# Altium PCB Bollbot_V100.PcbDoc
Units mil, origin at the board's own origin, x right, y up, seen from the top; angles counter-clockwise.
Board outline 4173.23 x 2952.76 mil, 4 copper layers (Top Layer, VCC, GND, Bottom Layer), stack 30.634 mil thick; 143 components, 132 nets, 550 pads, 270 vias.
Unrouted connection lines stored in the file: 312.
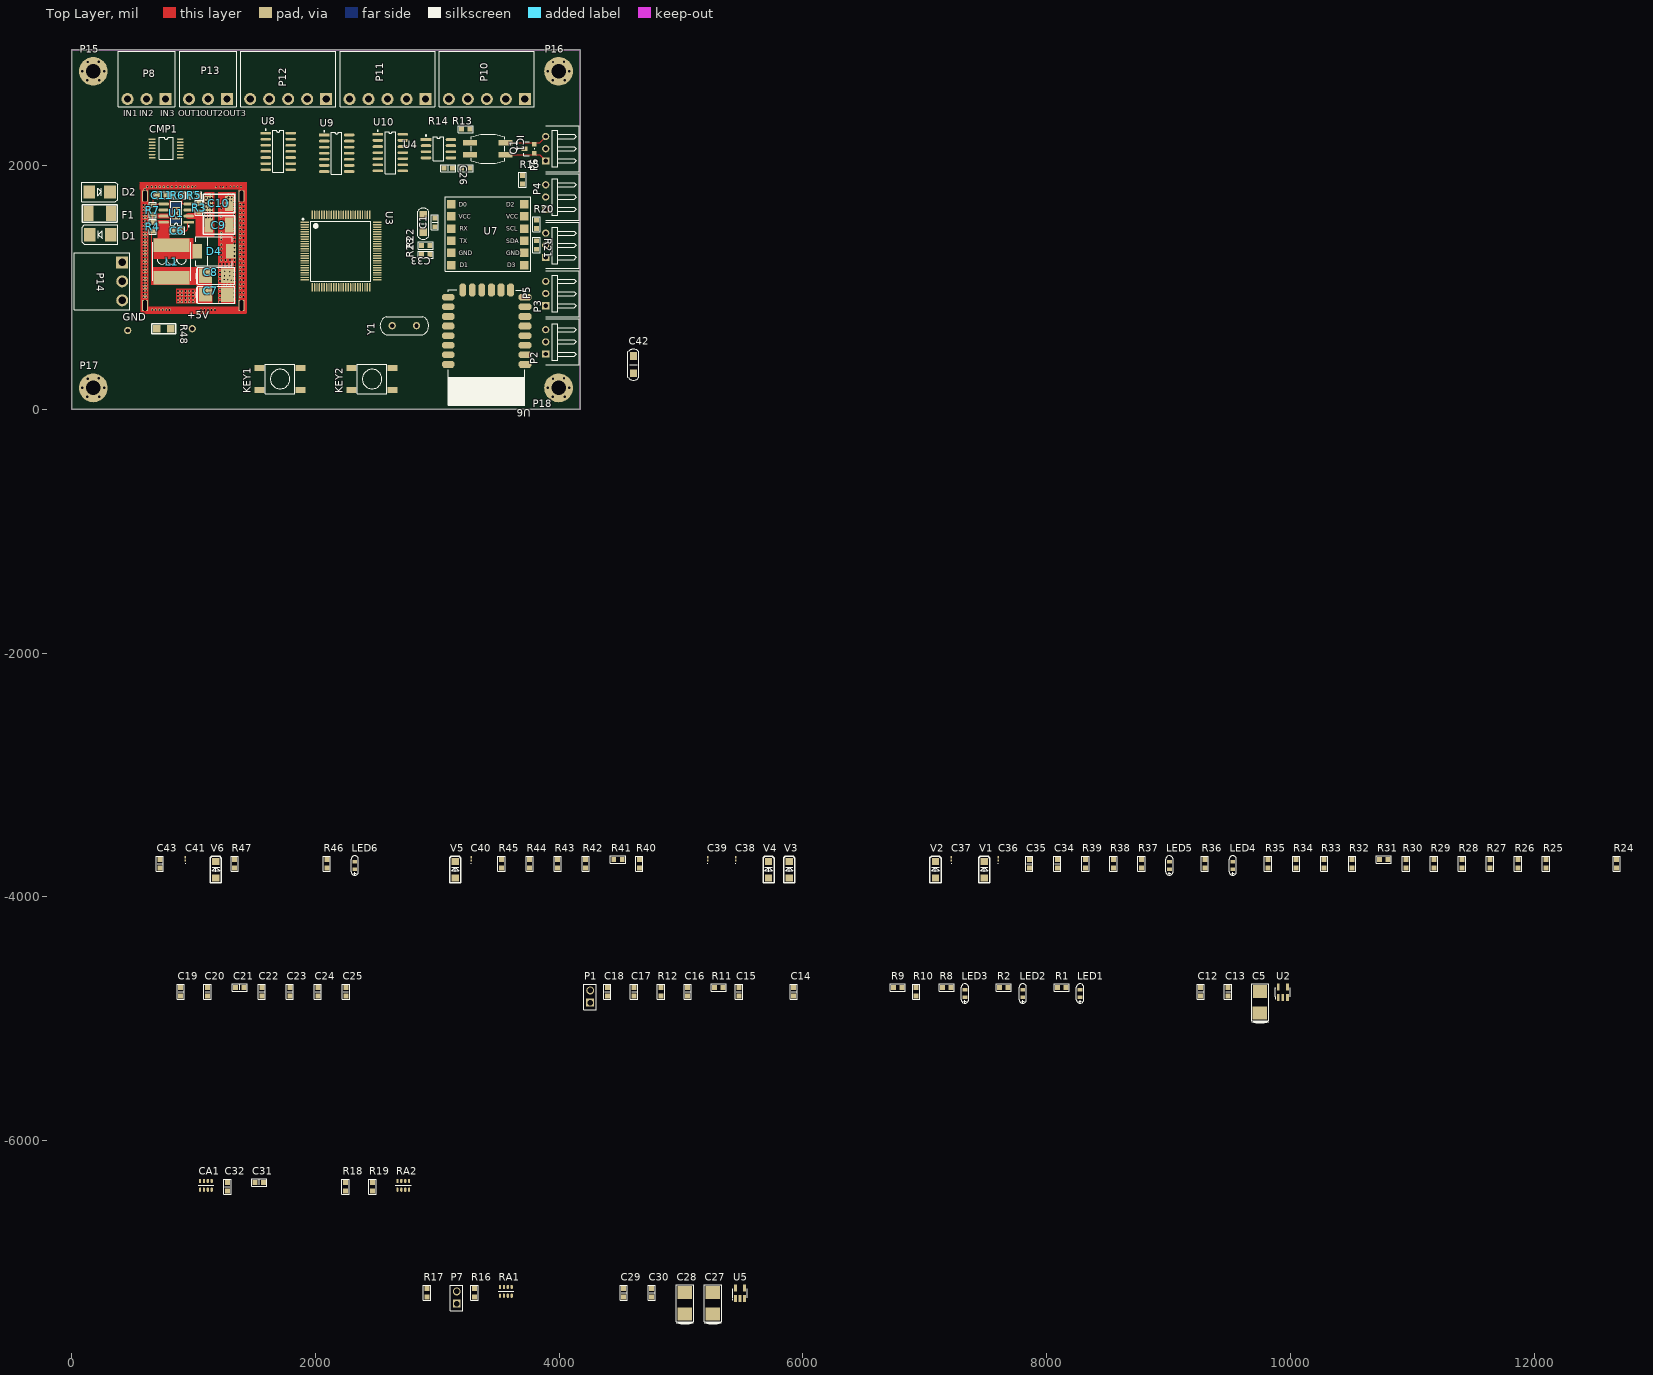
[diagram p0: Top Layer view]
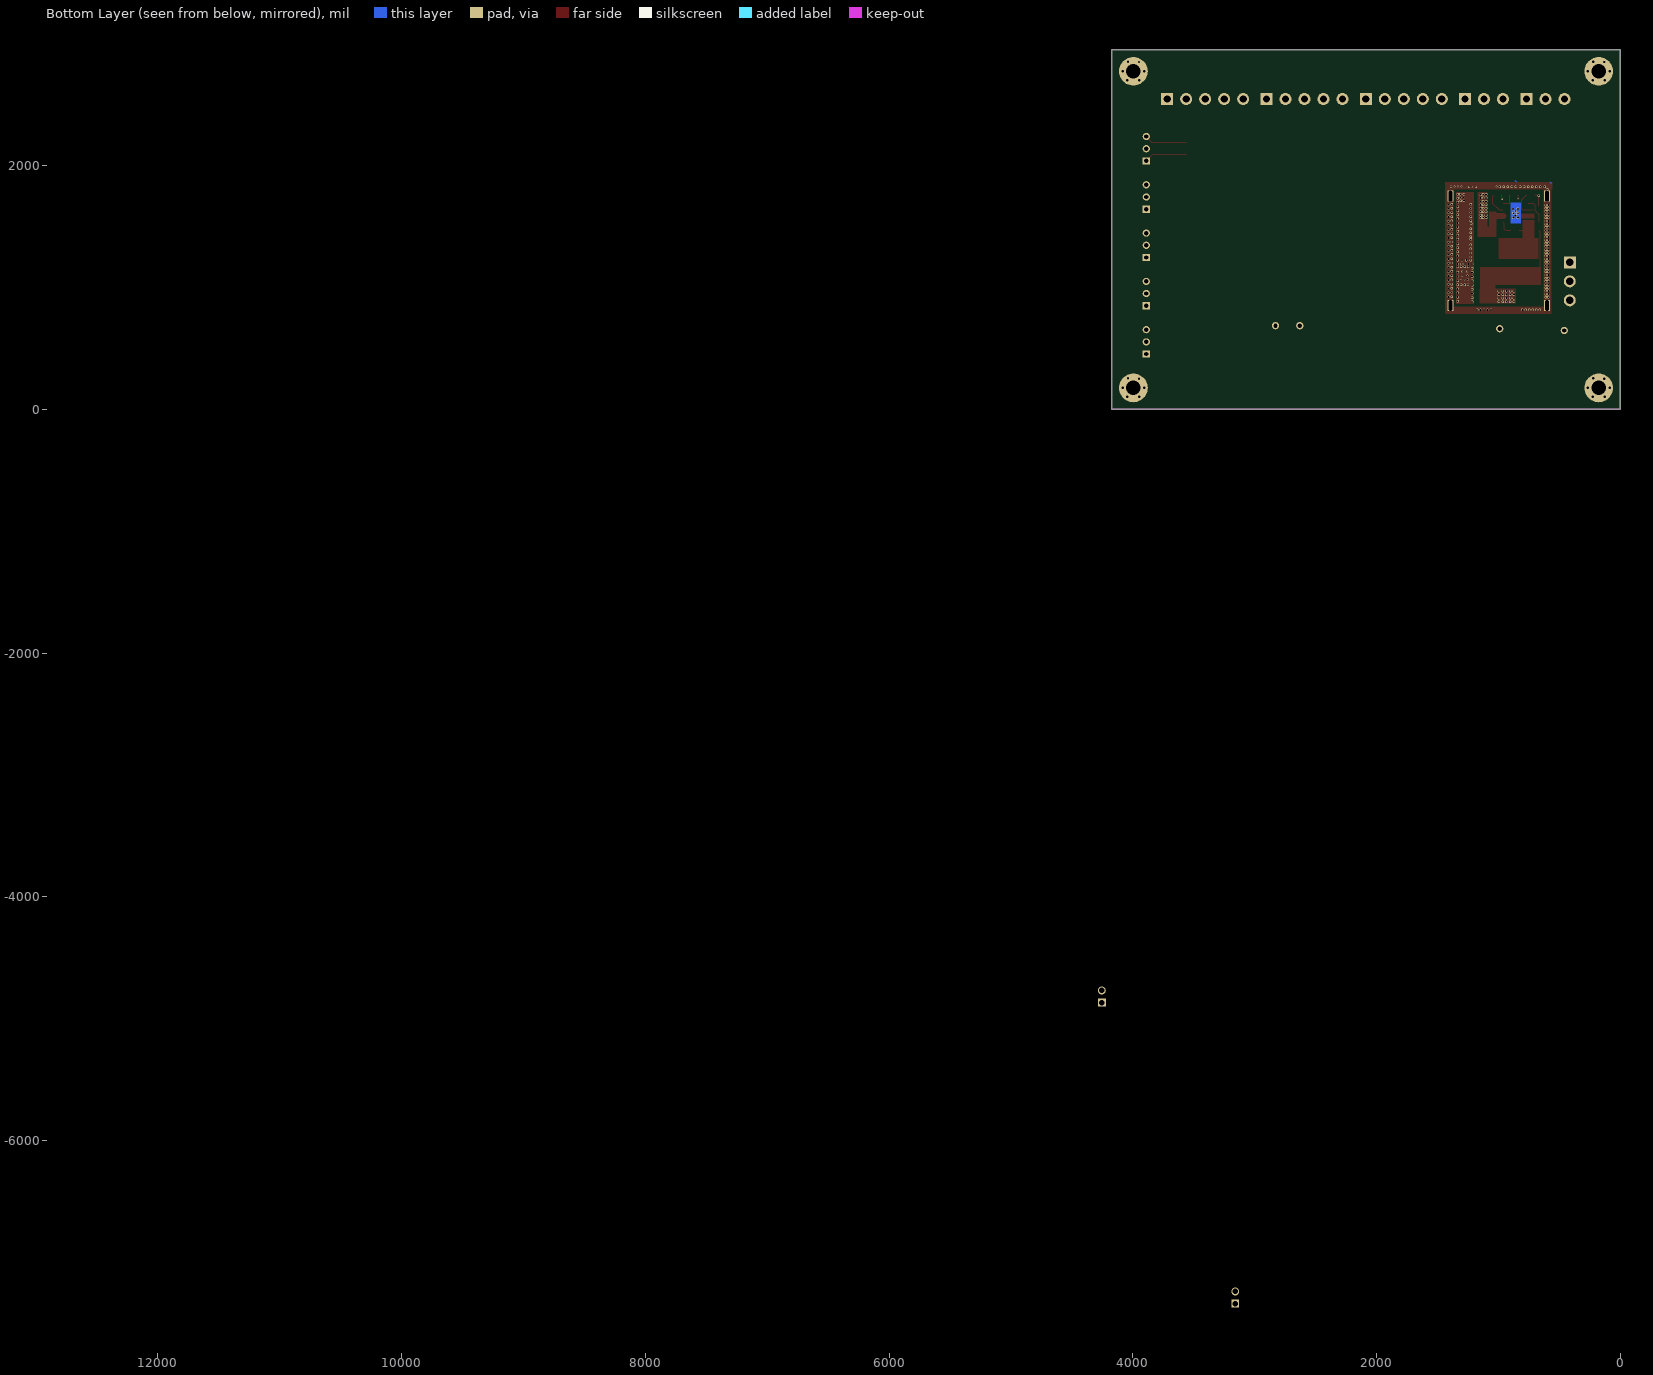
[diagram p1: Bottom Layer view, seen from below]

## Layer stack, top to bottom
Top Solder: solder mask 0.4, Solder Resist, Dk 3.5
Top Layer: signal copper 1.4
Dielectric 1: core 10, FR-4, Dk 4.2
VCC: signal copper 1.417
Dielectric 3: prepreg 5, Dk 4.2
GND: signal copper 1.417
Dielectric 2: core 10, Dk 4.2
Bottom Layer: signal copper 1.4
Bottom Solder: solder mask 0.4, Solder Resist, Dk 3.5

## Board outline
0,0 4173.23,0 4173.23,2952.76 0,2952.76

## Design rules (kind name [scope] priority, off if disabled: settings)
Clearance Clearance_1 [All] p1 off: gap=15
Clearance [All] p2: gap=8
ComponentClearance [All] p1: gap=0 collisioncheckmode=3 verticalgap=0 showdistances=FALSE
HoleSize [All] p1: absolutevalues=TRUE maxlimit=500 minlimit=1 maxpercent=80.000 minpercent=20.000
HoleToHoleClearance [All] p1: gap=0 allowstackedmicrovias=TRUE
MinimumSolderMaskSliver [All] p1: minsoldermaskwidth=0
PlaneClearance [InNet('GND')] p1 off: clearance=0
PlaneClearance PlaneClearance_1 [All] p2: clearance=20
PolygonConnect [IsVia vs InNet('VCC_+3.0V')] p1: connectstyle=Direct reliefconductorwidth=10 reliefentries=4 polygonreliefangle="90 Angle" airgapwidth=10
PolygonConnect PolygonConnect_1 [IsVia vs InNet('GND')] p2: connectstyle=Direct reliefconductorwidth=10 reliefentries=4 polygonreliefangle="90 Angle" airgapwidth=10
PolygonConnect PolygonConnect_2 [All] p3: connectstyle=Relief reliefconductorwidth=10 reliefentries=4 polygonreliefangle="90 Angle" airgapwidth=10
RoutingVias [All] p1: holewidth=12 width=20 viastyle="Through Hole" minholewidth=12 minwidth=20 maxholewidth=100 maxwidth=120
SilkToSilkClearance [All] p1: silktosilkclearance=0
SilkToSolderMaskClearance SilkscreenOverComponentPads [IsPad] p1: minsilkscreentomaskgap=0 clearancetoexposedcopper=TRUE
SolderMaskExpansion [All] p1: expansion=4
Width [All] p1: maxlimit=60 minlimit=8 preferedwidth=8
23 further rules are at their usual default settings.

## Classes and differential pairs
component class CAN: C26 IC1 P6 Q1 R13 R14 R15 U4
component class ESP8266: C27 C28 C29 C30 P7 R16 R17 RA1 U5 U6
component class IO: C31 C32 CA1 CMP1 P8 R18 R19 RA2
component class JY901: C1 C33 P5 R20 R21 R22 R23 U7
component class MCU: C5 C12 C13 C14 C15 C16 C17 C18 C19 C20 C21 C22 C23 C24 C25 KEY1 KEY2 LED1 LED2 LED3 P1 P2 P3 P4 P15 P16 P17 P18 R1 R2 R8 R9 R10 R11 R12 U2 U3 Y1
component class Power: +5V C6 C7 C8 C9 C10 C11 C42 D1 D2 D4 F1 GND L1 P14 R3 R4 R5 R6 R7 R48 U1
component class PWM: C34 C35 C36 C37 C38 C39 C40 C41 C43 LED4 LED5 LED6 P10 P11 P12 P13 R24 R25 R26 R27 R28 R29 R30 R31 R32 R33 R34 R35 R36 R37 R38 R39 R40 R41 R42 R43 R44 R45 R46 R47 U8 U9 U10 V1 V2 V3 V4 V5 V6

## Components (designator, comment, footprint, x,y, rotation, side; value= is the part's Value field where it differs from the comment)
+5V "Test Point" TestPoint-2 990,662.76 r0 top
C1 "0.1uF" 0603C 2980,1535 r90 top
C5 "10uF" CAPTANC 9750,-4952.24 r90 top
C6 "0.1uF/50V" 0603C 865,1467.76 r0 top
C7 "100uF/16V" CAPTANC 1100,943.76 r0 top locked
C8 "100uF/16V" CAPTANC 1100,1098.76 r0 top locked
C9 "47uF/50V" 1812C 1209,1513.76 r0 top
C10 "47uF/50V" 1812C 1209,1690.76 r0 top
C11 "22nF/50V" 0603C 738,1757.76 r0 top
C12 "0.1uF" 0603C 9265,-4777.24 r90 top
C13 "0.1uF/50V" 0603C 9490,-4777.24 r90 top
C14 "180pF/50V" 0603C 5925,-4777.24 r90 top
C15 "180pF/50V" 0603C 5475,-4777.24 r90 top
C16 "0.1uF" 0603C 5055,-4777.24 r90 top
C17 "2.2uF" 0603C 4615,-4777.24 r90 top
C18 "2.2uF" 0603C 4395,-4777.24 r90 top
C19 "1uF" 0603C 895,-4777.24 r90 top
C20 "0.1uF" 0603C 1115,-4777.24 r90 top
C21 "0.1uF" 0603C 1380,-4742.24 r0 top
C22 "0.1uF" 0603C 1560,-4777.24 r90 top
C23 "0.1uF" 0603C 1790,-4777.24 r90 top
C24 "0.1uF" 0603C 2020,-4777.24 r90 top
C25 "0.1uF" 0603C 2250,-4777.24 r90 top
C26 "102" 0603C 3090,1980 r0 top
C27 "100uF/16V" CAPTANC 5260,-7422.24 r90 top
C28 "10uF" CAPTANC 5030,-7422.24 r90 top
C29 "0.1uF" 0603C 4530,-7247.24 r90 top
C30 "0.1uF/50V" 0603C 4760,-7247.24 r90 top
C31 "0.1uF/50V" 0603c 1538.23,-6342.24 r0 top
C32 "0.1uF/50V" 0603C 1278.23,-6377.24 r90 top
C33 "100uF/16V" 1206C 2885,1525 r270 top
C34 "104" 0603C 8088.23,-3727.24 r90 top
C35 "104" 0603C 7858.23,-3727.24 r90 top
C36 "1n/25V" 0603 7603.23,-3687.24 r90 top
C37 "1n/25V" 0603 7218.23,-3687.24 r90 top
C38 "1n/25V" 0603 5448.23,-3687.24 r90 top
C39 "1n/25V" 0603 5218.23,-3687.24 r90 top
C40 "1n/25V" 0603 3278.23,-3687.24 r90 top
C41 "1n/25V" 0603 933.23,-3687.24 r90 top
C42 "0.1uF" 1206C 4610,367.76 r90 top
C43 "104" 0603C 723.23,-3727.24 r90 top
CA1 "1nF/50V" RES_PACK_SMD_E 1053.23,-6402.24 r0 top
CMP1 "2901VQ" TSSOP14 775,2142.76 r0 top
D1 "MBRS3200T3G" DO-214AA 234.75,1434.95 r180 top
D2 "SMBJ36CA" DO-214AA 229.75,1784.95 r0 top
D4 "MBRS360T3G" DO214AB 1031,1299.76 r0 top
F1 "FSMD185" "1812R - duplicate1" 229.75,1609.95 r180 top
GND "Test Point" TestPoint-2 460,647.76 r0 top
IC1 "B82793S0513N201" EPCOS_Chokes 3415,2140 r0 top
KEY1 "" KEY_SMT 1710,250 r90 top
KEY2 "" KEY_SMT 2465,250 r90 top
L1 "HCNR8040NT8R2,8.2uH,（8*8）" 电感 821,1213.76 r270 top
LED1 "LED" LED-0603 8275,-4787.24 r90 top
LED2 "LED" LED-0603 7805,-4787.24 r90 top
LED3 "LED" LED-0603 7330,-4787.24 r90 top
LED4 "LED" LED-0603 9528.23,-3737.24 r90 top
LED5 "LED" LED-0603 9008.23,-3737.24 r90 top
LED6 "LED" LED-0603 2323.23,-3737.24 r90 top
P1 "Header 2" HDR1*2 4255,-4817.24 r90 top
P2 "Header 3H" XH254-3P 3890,555 r90 top
P3 "Header 3H" XH254-3P 3890,951.25 r90 top
P4 "UART4" XH254-3P 3890,1743.75 r90 top
P5 "I2C" XH254-3P 3890,1347.5 r90 top
P6 "Header 3" XH254-3P 3890,2140 r90 top
P7 "Header 2" "HDR1*2 - duplicate" 3160,-7287.24 r90 top
P8 "Header 3" "HT396  3P" 770,2547.76 r180 top
P10 "Header 5" HT396 3095,2547.76 r180 top
P11 "Header 5" HT396 2280,2547.76 r180 top
P12 "Header 5" HT396 1465,2547.76 r180 top
P13 "Header 3" "HT396  3P" 1275,2547.76 r180 top
P14 "Header 3" "HT396  3P" 415,1207.76 r270 top
P15 "PAD" "PAD 3mm" 177.17,2775.59 r0 top
P16 "PAD" "PAD 3mm" 3996.06,2775.59 r0 top
P17 "PAD" "PAD 3mm" 177.17,177.17 r0 top
P18 "PAD" "PAD 3mm" 3996.06,177.17 r0 top
Q1 "NUP2105LT1G" SOT23 3755,2140 r90 top
R1 "10K" 0603R 8125,-4747.24 r0 top
R2 "10K" 0603R 7650,-4747.24 r0 top
R3 "100K" 0603R 1040,1654.76 r270 top
R4 "100K" 0603R 661,1500.76 r270 top
R5 "12K" 0603R 1007,1762.76 r180 top
R6 "100K" 0603R 872.5,1762.76 r180 top
R7 "17.8K" 0603R 661,1636.76 r270 top
R8 "10K" 0603R 7180,-4747.24 r0 top
R9 "4.7K" 0603R 6780,-4747.24 r0 top
R10 "4.7K" 0603R 6935,-4777.24 r90 top
R11 "10K" 0603R 5310,-4747.24 r0 top
R12 "4.7K" 0603R 4840,-4777.24 r90 top
R13 "60R" 0603R 3235,2295 r0 top
R14 "60R" 0603R 3235,1975 r0 top
R15 "100K" 0603R 3705,1885 r90 top
R16 "4.7K" 0603R 3310,-7247.24 r90 top
R17 "4.7K" 0603R 2920,-7247.24 r90 top
R18 "10K" 0603R 2253.23,-6377.24 r90 top
R19 "10K" 0603R 2473.23,-6377.24 r90 top
R20 "4.7K" 0603R 3820,1520 r90 top
R21 "4.7K" 0603R 3810,1350 r270 top
R22 "100R" 0603R 2905,1350 r180 top
R23 "100R" 0603R 2905,1275 r180 top
R24 "101" 0603R 12683.23,-3727.24 r90 top
R25 "471" 0603R 12103.23,-3727.24 r90 top
R26 "101" 0603R 11873.23,-3727.24 r90 top
R27 "471" 0603R 11643.23,-3727.24 r90 top
R28 "101" 0603R 11413.23,-3727.24 r90 top
R29 "471" 0603R 11183.23,-3727.24 r90 top
R30 "101" 0603R 10953.23,-3727.24 r90 top
R31 "471" 0603R 10768.23,-3697.24 r0 top
R32 "101" 0603R 10513.23,-3727.24 r90 top
R33 "100R" 0603R 10283.23,-3727.24 r90 top
R34 "101" 0603R 10053.23,-3727.24 r90 top
R35 "100R" 0603R 9823.23,-3727.24 r90 top
R36 "101" 0603R 9303.23,-3727.24 r90 top
R37 "10K" 0603R 8783.23,-3727.24 r90 top
R38 "101" 0603R 8553.23,-3727.24 r90 top
R39 "10K" 0603R 8323.23,-3727.24 r90 top
R40 "101" 0603R 4663.23,-3727.24 r90 top
R41 "471" 0603R 4483.23,-3697.24 r0 top
R42 "101" 0603R 4223.23,-3727.24 r90 top
R43 "471" 0603R 3993.23,-3727.24 r90 top
R44 "101" 0603R 3763.23,-3727.24 r90 top
R45 "100R" 0603R 3533.23,-3727.24 r90 top
R46 "101" 0603R 2098.23,-3727.24 r90 top
R47 "10K" 0603R 1343.23,-3727.24 r90 top
R48 "0R" 1206R 755,662.76 r0 top
RA1 "33K" RES_PACK_SMD_E 3515,-7272.24 r0 top
RA2 "33K" RES_PACK_SMD_E 2673.23,-6402.24 r0 top
U1 "LMR14030" LMR14030 858,1611.76 r180 top
U2 "BL8555-30PRA" SOT23-5 9940,-4782.24 r0 top
U3 "STM32F407VGT6" LQFP-100_14x14x05P 2210,1300 r270 top
U4 "SN65HVD230" SOP8 3015,2140 r0 top
U5 "BL8555-30PRA" SOT23-5 5485,-7252.24 r0 top
U6 "ESP8266" ESP8266 3720,980 r180 top
U7 "JY-901" JY-901 3115,1185 r0 top
U8 "74HC08" SOP14 1695,2117.76 r0 top
U9 "74HC08" SOP14 2175,2102.76 r0 top
U10 "74HC08" SOP14 2615,2107.76 r0 top
V1 "3.6V/0.5W" 1206D 7488.23,-3777.24 r90 top
V2 "3.6V/0.5W" 1206D 7088.23,-3777.24 r90 top
V3 "3.6V/0.5W" 1206D 5888.23,-3777.24 r90 top
V4 "3.6V/0.5W" 1206D 5718.23,-3777.24 r90 top
V5 "3.6V/0.5W" 1206D 3148.23,-3777.24 r90 top
V6 "3.6V/0.5W" 1206D 1183.23,-3777.24 r90 top
Y1 "25M" XTAL 2730,687.76 r180 top

## Footprints (in the part's own frame and the unit in brackets; to place one, negate y for a bottom-side part, rotate by r counter-clockwise, add the part's x,y. Pads: shape width x height; smd on the part's side, far side on the other; paste and mask are expansions set on the pad)
0603 [mm] "Chip Inductor, Body 0.6x0.3mm, IPC High Density"
  rect 0.5x0.3 smd: 1(-0.35,0) 2(0.35,0)
  silkscreen extent -0.9,-0.05 -0.9,0.05, body extent -0.33,-0.18 0.33,0.18, height 0.55
0603C [mil]
  rect 40x41 smd: 1(-35,0) 2(35,0)
  silkscreen extent -62,-30 62,30, body extent -31,-16 31,16, height 24
0603c [mil]
  rect 40x41 smd: 1(-35,0) 2(35,0)
  silkscreen extent -62,-30 62,30, body extent -31,-16 31,16, height 24
0603R [mil]
  rect 40x41 smd: 1(35,5) 2(-35,5)
  silkscreen extent -62,-25 62,35, body extent -31,-11 31,21, height 18
1206C [mil]
  rect 65x60 smd: 1(-70,0) 2(70,0)
  silkscreen extent -128,-45 127,45, body extent -63,-31 63,32, height 39
1206D [mil] "1206-Diode"
  rect 60x60 smd: 1(-67.5,0) 2(67.5,0)
  silkscreen extent -107,-46 110,45, body extent -73,-31 73,32
1206R [mil]
  rect 60x60 smd: 1(-57.5,0) 2(57.5,0)
  silkscreen extent -99,-42 100,42, body extent -63,-31 63,31, height 22
1812C [mm]
  rect 1.8x3.2 smd: 1(-2.1,0) 2(2.1,0)
  silkscreen extent -3.33,-1.91 3.33,1.91, body extent -2.25,-1.6 2.25,1.6, height 1.6
"1812R - duplicate1" [mil]
  rect 80x125 smd: 1(92.5,0) 2(-92.5,0)
  silkscreen extent -142,-72 143,72, body extent -92,-53 95,51, height 100
CAPTANC [mm]
  rect 2.7x3 smd: 1(0,0) 2(4.502,-0.025)
  round 0.5 on Top Overlay: ""(-2.388,1.524)
  silkscreen extent -2.06,-1.83 6.1,1.73, body extent -0.84,-1.8 5.26,1.55, height 2.7
DO214AB [mil]
  rect 80x120 smd: 1(275.59,0) 2(0,0)
  silkscreen extent -12,-118 287,118
DO-214AA [mm]
  rect 2.4x2.8 smd: 1(-2.153,0.001) 2(2.153,-0.001)
  silkscreen extent -3.68,-2.03 3.76,2.03, body extent -2.65,-1.85 2.65,1.85, height 2.2
EPCOS_Chokes [mm]
  rect 2.85x1.2 smd: 1(-3.7,1.25) 2(3.7,1.25) 3(3.7,-1.25) 4(-3.7,-1.25)
  silkscreen extent -3.5,-3 3.5,3
ESP8266 [mm]
  oct 2.7x1.4 smd: 1(0,15.5) 2(0,13.5) 3(0,11.5) 4(0,9.5) 5(0,7.5) 6(0,5.5) 7(0,3.5) 8(0,1.5) 15(16,1.5) 16(16,3.5) 17(16,5.5) 18(16,7.5) 19(16,9.5) 20(16,11.5) 21(16,13.5) 22(16,15.5)
  oct 1.4x2.7 smd: 9(3,0) 10(5,0) 11(7,0) 12(9,0) 13(11,0) 14(13,0)
  silkscreen extent 0,-0.03 16.03,24
HDR1*2 [mil]
  rect 65x65 hole 45: 1(-50,0)
  round 65 hole 45: 2(50,0)
  silkscreen extent -109,-51 101,53, body extent -104,-49 96,49, height 323
"HDR1*2 - duplicate" [mil]
  rect 65x65 hole 45: 1(-50,0)
  round 65 hole 45: 2(50,0)
  silkscreen extent -109,-51 101,53, body extent -104,-49 96,49, height 323
HT396 [mm]
  rect 2.5x2.5 hole 1.5: 1(-15.84,0)
  round 2.5 hole 1.5: 2(-11.88,0) 3(-7.92,0) 4(-3.96,0) 5(0,0)
  silkscreen extent -17.82,-10 1.98,1.57
"HT396  3P" [mm]
  rect 2.5x2.5 hole 1.5: 1(0,0)
  round 2.5 hole 1.5: 2(3.96,0) 3(7.92,0)
  silkscreen extent -1.98,-10 9.9,1.57
JY-901 [mil]
  rect 70x70 smd: 1(0.63,499.63) 2(0.63,399.63) 3(0.63,299.63) 4(0.63,199.63) 5(0.63,99.63) 6(0.63,-0.37) 7(600.63,-0.37) 8(600.63,99.63) 9(600.63,199.63) 10(600.63,299.63) 11(600.63,399.63) 12(600.63,499.63)
  silkscreen extent -49,-51 652,561
KEY_SMT [mil]
  rect 50x80 smd: 1(-90,168.75) 1(-90,-168.75) 2(90,168.75) 2(90,-168.75)
  silkscreen extent -120,-120 120,123, body extent -118,-197 118,197, height 197
LED-0603 [mil]
  rect 30x40 smd: 1(-35,0) 2(25,0)
  silkscreen extent -85,-30 75,30, body extent -37,-16 27,16, height 24
LMR14030 [mm]
  rect 2.2x0.6 smd: 1(-2.6,1.905)
  oval 2.2x0.6 smd: 2(-2.6,0.635) 3(-2.6,-0.635) 4(-2.6,-1.905) 5(2.6,-1.905) 6(2.6,-0.635) 7(2.6,0.635) 8(2.6,1.905)
  rect 1.6x2.6 smd: 7(0,0)
  silkscreen extent -2.72,-2.5 1.1,2.88, body extent -2.87,-2.45 3.13,2.45, height 1.7
LQFP-100_14x14x05P [mm]
  oval 0.28x1.8 smd mask+0.051: 1(-6,-7.55) 2(-5.5,-7.55) 3(-5,-7.55) 4(-4.5,-7.55) 5(-4,-7.55) 6(-3.5,-7.55) 7(-3,-7.55) 8(-2.5,-7.55) 9(-2,-7.55) 10(-1.5,-7.55) 11(-1,-7.55) 12(-0.5,-7.55) 13(0,-7.55) 14(0.5,-7.55) 15(1,-7.55) 16(1.5,-7.55) 17(2,-7.55) 18(2.5,-7.55) 19(3,-7.55) 20(3.5,-7.55) 21(4,-7.55) 22(4.5,-7.55) 23(5,-7.55) 24(5.5,-7.55) 25(6,-7.55) 51(6,7.55) 52(5.5,7.55) 53(5,7.55) 54(4.5,7.55) 55(4,7.55) 56(3.5,7.55) 57(3,7.55) 58(2.5,7.55) 59(2,7.55) 60(1.5,7.55) 61(1,7.55) 62(0.5,7.55) 63(0,7.55) 64(-0.5,7.55) 65(-1,7.55) 66(-1.5,7.55) 67(-2,7.55) 68(-2.5,7.55) 69(-3,7.55) 70(-3.5,7.55) 71(-4,7.55) 72(-4.5,7.55) 73(-5,7.55) 74(-5.5,7.55) 75(-6,7.55)
  oval 1.8x0.28 smd mask+0.051: 26(7.55,-6) 27(7.55,-5.5) 28(7.55,-5) 29(7.55,-4.5) 30(7.55,-4) 31(7.55,-3.5) 32(7.55,-3) 33(7.55,-2.5) 34(7.55,-2) 35(7.55,-1.5) 36(7.55,-1) 37(7.55,-0.5) 38(7.55,0) 39(7.55,0.5) 40(7.55,1) 41(7.55,1.5) 42(7.55,2) 43(7.55,2.5) 44(7.55,3) 45(7.55,3.5) 46(7.55,4) 47(7.55,4.5) 48(7.55,5) 49(7.55,5.5) 50(7.55,6) 76(-7.55,6) 77(-7.55,5.5) 78(-7.55,5) 79(-7.55,4.5) 80(-7.55,4) 81(-7.55,3.5) 82(-7.55,3) 83(-7.55,2.5) 84(-7.55,2) 85(-7.55,1.5) 86(-7.55,1) 87(-7.55,0.5) 88(-7.55,0) 89(-7.55,-0.5) 90(-7.55,-1) 91(-7.55,-1.5) 92(-7.55,-2) 93(-7.55,-2.5) 94(-7.55,-3) 95(-7.55,-3.5) 96(-7.55,-4) 97(-7.55,-4.5) 98(-7.55,-5) 99(-7.55,-5.5) 100(-7.55,-6)
  silkscreen extent -6.8,-8.05 6.25,6.25, body extent -8,-8 8,8, height 1.6
"PAD 3mm" [mm]
  round 1 hole 0.5: 0(-2.261,0) 0(-1.219,-1.854) 0(-1.168,1.93) 0(1.118,2.007) 0(1.245,-1.854) 0(2.25,0)
  round 6 hole 3: 0(0,0)
RES_PACK_SMD_E [mil]
  oval 18x35 smd: 1(0,0) 2(32,0) 3(64,0) 4(96,0) 5(96,72) 6(64,72) 7(32,72) 8(0,72)
  silkscreen extent -16,36 112,36, body extent -15,6 111,69, height 22
SOP8 [mm]
  rect 2.2x0.6 smd: 1(-2.727,1.905)
  oval 2.2x0.6 smd: 2(-2.727,0.635) 3(-2.727,-0.635) 4(-2.727,-1.905) 5(2.473,-1.905) 6(2.473,-0.635) 7(2.473,0.635) 8(2.473,1.905)
  silkscreen extent -2.85,-2.5 0.97,2.88, body extent -3,-2.45 3,2.45, height 1.7
SOP14 [mm]
  rect 2.2x0.55 smd: 1(-2.6,3.81)
  oval 2.2x0.55 smd: 2(-2.6,2.54) 3(-2.6,1.27) 4(-2.6,0) 5(-2.6,-1.27) 6(-2.6,-2.54) 7(-2.6,-3.81) 8(2.6,-3.81) 9(2.6,-2.54) 10(2.6,-1.27) 11(2.6,0) 12(2.6,1.27) 13(2.6,2.54) 14(2.6,3.81)
  silkscreen extent -2.72,-4.37 1.1,4.68, body extent -3.1,-4.35 3.1,4.35, height 1.61
SOT23 [mil]
  rect 36x36 smd: 1(-37.5,-40) 2(37.5,-40)
  rect 36x50 smd: 3(0.5,40)
  silkscreen extent -58,-45 58,45, body extent -59,-49 59,49, height 42
SOT23-5 [mm]
  rect 0.55x1.45 smd: 1(-0.966,-1.076) 2(-0.016,-1.076) 3(0.934,-1.076) 4(0.934,1.074) 5(-0.966,1.074)
  silkscreen extent -1.59,-1.35 1.53,0.9
TestPoint-2 [mm]
  round 1.5 hole 0.9: 0(0,0)
  body extent -1.27,-1.27 1.27,1.27, height 4.89
TSSOP14 [mil]
  rect 55x12 smd: 1(-115,76.77)
  oval 55x12 smd: 2(-115,51.18) 3(-115,25.59) 4(-115,0) 5(-115,-25.59) 6(-115,-51.18) 7(-115,-76.77) 8(115,-76.77) 9(115,-51.18) 10(115,-25.59) 11(115,0) 12(115,25.59) 13(115,51.18) 14(115,76.77)
  silkscreen extent -57,-91 57,90, body extent -126,-98 126,98, height 43
XH254-3P [mm] "Connector; Header; 5 Position"
  rect 1.5x1.5 hole 0.9: 1(-2.54,0)
  round 1.5 hole 0.9: 2(0,0) 3(2.54,0)
  silkscreen extent -4.8,-7 4.8,0
XTAL [mil]
  round 60 hole 35: 1(100,0) 2(-100,0)
  silkscreen extent -200,-75 200,75, body extent -213,-89 213,89, height 138
电感 [mm]
  rect 2.8x7.5 smd: 1(-3.4,0) 2(3.4,0)
  silkscreen extent -4,-4 4,4

## Part data
+5V GND: library part TestPoint
C1 C12 C16 C17 C18 C19 C20 C21 C22 C23 C24 C25 C29 C36 C37 C38 C39 C40 C41 C42: library part Cap, "Capacitor"
C5 C28: library part "Cap Pol", "Polarized Capacitor (Radial)"
C6 C11 C14 C15 C34 C35 C43: library part 0603C
C7 C8 C27 C33: library part EC, "Electrolytic Capacitor"
C9 C10 C13 C30 C31 C32: library part CAP
C26: library part CAP, "Capacitor"
CA1: library part CAP_PACK4
CMP1: library part LM339
D1: library part "D Schottky", "Schottky Diode"
D2: library part "D Zener", "Zener Diode"
D4: library part DIODE_A
F1: library part FUSE1, "Fuse"
IC1: library part "EPCOS Chokes", "Common-mode chokes, ring core"
KEY1 KEY2: library part SW-PB
L1: library part INDUCTOR, "MSS1260T-103MLD  12*12 10UH 6.92A"
LED1 LED2 LED3 LED4 LED5 LED6: "Typical INFRARED GaAs LED"
P1 P7: "Header, 2-Pin"
P2 P3: "Header, 3-Pin, Right Angle"
P4 P5: library part "Header 3H", "Header, 3-Pin, Right Angle"
P6 P8 P13 P14: "Header, 3-Pin"
P10 P11 P12: "Header, 5-Pin"
Q1: library part SOT23
R1 R2 R8: library part Res2, "Resistor"
R3 R4 R5 R6 R7 R13 R14 R15 R48: library part RES2A
R9 R10 R11 R12 R16 R17 R18 R19 R20 R21 R22 R23 R24 R25 R26 R27 R28 R29 R30 R31 R32 R33 R34 R35 R36 R37 R38 R39 R40 R41 R42 R43 R44 R45 R46 R47: library part 0603R
RA1 RA2: library part RESPACK4
U2 U5: library part SGM2019
U4: library part SN65HVD230D
U7: "君悦智控高精度9轴传感器"
U8 U9 U10: "Quad 2-input NAND gate"
V1 V2 V3 V4 V5 V6: library part DIODE-SCHOTTKY, "DIODE SCHOTTKY"
Y1: library part XTAL, "Crystal Oscillator"

## Free pads (board coordinates)
  rect 47.24x90.55 hole 30 slot 86.61 at 90 deg: 1(602,1750.76) 1(1394,853.76) 1(1394,1750.76) 2(602,853.76)

## Via types
v1: diameter 20, hole 15, Top Layer to Bottom Layer, 253 vias
v2: diameter 15, hole 12, Top Layer to Bottom Layer, 17 vias

## Nets (pads, with @x,y where several pads share a name; then routed paths per layer and width w, separated by ;. In a path a pad name is that pad's centre, name@x,y a point inside that pad or via, vN(x,y) a via of type N, cw(c..) or ccw(c..) an arc to the next point about the centre after c; other vN are vias at no path point)
+24V: C9.1 C10.1 C42.2 D2.2 F1.2 R3.1 RA2.1 RA2.2 RA2.3 RA2.4 U1.2 | length 170.9
  Top Layer w10: C10.1@1125.32,1641.76 C10.1@1125.32,1682.08 ; C10.1@1142,1640.76 C10.1@1142,1681.08
  Top Layer w50: U1.2 1045,1586.76 1049,1582.76
  other v1: 1147,1573.76 1101,1574.76 1125,1574.76 1147,1593.76 1101,1594.76 1125,1594.76 1147,1622.18 1101,1623.18 1125,1623.18 1147,1650.47 1101,1651.47 1125,1651.47 1147,1678.76 1101,1679.76 1125,1679.76 1147,1707.04 1101,1708.04 1125,1708.04 1147,1735.33 1101,1736.33 1125,1736.33 1147,1763.61 1101,1764.61 1125,1764.61
BOOT0: P1.1 R12.2 U3.94
CAN_RX: U3.70 U4.4
CAN_TX: U3.71 U4.1
CANH: IC1.2 P6.3 Q1.2 | length 350.4
  Top Layer w10: IC1.2 3839.21,2189.21 P6.3
CANL: IC1.3 P6.1 Q1.1 | length 350.4
  Top Layer w10: IC1.3 3839.21,2090.79 P6.1
DGND: C14.1 C15.1 C34.2 C35.2 C43.2 U8.7 U9.7 U10.7
DIR1: P10.5 R29.1
DIR2: P11.5 R31.1
DIR3: P12.5 R43.1
GND: C1.1 C5.2 C7.2 C8.2 C9.2 C10.2 C11.1 C12.1 C13.2 C16.1 C17.2 C18.2 C19.1 C20.1 C21.1 C22.1 C23.1 C24.1 C25.1 C26.1 C27.2 C28.2 C29.1 C30.2 C31.2 C32.2 C33.2 C36.2 C37.1 C38.1 C39.1 C40.1 C41.1 C42.1 CA1.1 CA1.2 CA1.3 CA1.4 CMP1.9 CMP1.12 D2.1 D4.1 GND.0 KEY1.2 KEY2.2 LED1.2 LED2.2 LED3.2 LED4.2 LED5.2 LED6.2 P2.2 P3.3 P4.3 P5.3 P6.2 P7.2 P10.3 P11.3 P12.3 P14.2 pad.1 pad.2 Q1.3 R5.1 R6.1 R7.2 R12.1 R15.2 R17.2 R18.1 U1.7 U2.2 U3.10 U3.19 U3.20 U3.27 U3.74 U3.99 U4.2 U5.2 U6.15 U7.5 U7.8 V1.1 V2.1 V3.1 V4.1 V5.1 V6.1 | length 3783.6
  Top Layer w10: R7.2@669,1670.76 v1(669,1755.76) 671,1757.76 C11.1 ; U1.7@833.5,1653.26 v1(841,1645.76) ; v2(837.5,1726.26) R6.1 ; v2(972,1727.76) R5.1 ; R5.1@974,1752.76 R5.1@974,1760.47
  Top Layer w50: v1(1389.32,1828.43) 604,1828.43 604,821.76 1392,821.76 v1@1392,1825.76
  other v1: 661.19,816.76 689.78,816.76 718.37,816.76 746.97,816.76 775.56,816.76 804.15,816.76 1061.48,816.76 1090.07,816.76 1118.67,816.76 1147.26,816.76 1175.85,816.76 1216,882.76 1335,888.76 1216,917.31 590,921.07 612,921.07 1335,922.53 1410,923.97 1384,925.71 590,947.15 612,947.15 1216,951.87 1335,956.29 1410,958.5 1384,960.24 590,973.23 612,973.23 1216,986.42 1335,990.06 1410,993.02 1384,994.76 590,999.31 612,999.31 1216,1020.98 1250,1023.83 1278.33,1023.83 1306.67,1023.83 1335,1023.83 590,1025.39 612,1025.39 1410,1027.55 1384,1029.29 590,1051.47 612,1051.47 1216,1055.53 1335,1057.6 1410,1062.07 1384,1063.81 590,1077.54 612,1077.54 1216,1090.09 1335,1091.37 1410,1096.6 1384,1098.34 590,1103.62 612,1103.62 1216,1124.64 1335,1125.14 590,1129.7 612,1129.7 1410,1131.13 1384,1132.87 590,1155.78 612,1155.78 1216,1159.2 1410,1165.65 1384,1167.39 1246.5,1172.76 1276,1172.76 1305.5,1172.76 1335,1172.76 590,1181.86 612,1181.86 1216,1193.76 1245.75,1193.76 1275.5,1193.76 1305.25,1193.76 1335,1193.76 1410,1200.18 1384,1201.92 590,1207.94 612,1207.94 1228,1226.45 1263.67,1226.45 1299.33,1226.45 1335,1226.45 590,1233.76 612,1233.76 1410,1234.7 1384,1236.44 1228,1251.16 590,1260.1 612,1260.1 1335,1260.22 1410,1271.02 1384,1272.76 1228,1284.36 590,1286.17 612,1286.17 1335,1293.99 1410,1303.76 1384,1305.5 590,1312.25 612,1312.25 1228,1317.56 1335,1327.76 590,1338.33 612,1338.33 1410,1338.28 1384,1340.02 1228,1350.76 1335,1361.52 590,1364.41 612,1364.41 1410,1372.81 1384,1374.55 590,1390.49 612,1390.49 1228,1395.29 1335,1395.29 1410,1407.33 1384,1409.07 590,1416.57 612,1416.57 1228,1417.16 1335,1429.06 1410,1441.86 590,1442.65 612,1442.65 1384,1443.6 1228,1450.36 1335,1462.83 590,1468.73 612,1468.73 1410,1476.39 1384,1478.12 1228,1483.56 590,1494.8 612,1494.8 1335,1496.6 1410,1510.91 1384,1512.65 590,1520.88 612,1520.88 1225,1523.76 1335,1530.37 1410,1545.44 590,1546.96 612,1546.96 1384,1547.18 1228,1549.96 1335,1564.14 590,1573.04 612,1573.04 841,1574.76 877,1574.76 1410,1579.96 1384,1581.7 1228,1583.16 859,1592.51 1335,1597.91 590,1599.12 612,1599.12 841,1610.26 877,1610.26 1410,1614.49 1384,1616.23 1228,1616.36 590,1625.2 612,1625.2 858,1627.76 1335,1631.68 881,1644.76 1410,1649.01 1228,1649.56 1384,1650.75 590,1651.28 612,1651.28 1335,1665.45 590,1677.36 612,1677.36 1410,1681.02 1228,1682.76 1384,1682.76 1335,1699.22 1310,1712.76 1284,1713.76 1335,1732.99 1287,1739.76 1313,1739.76 1284,1766.76 1312,1766.76 1335,1766.76 601,1807.75 622,1828.43 655.5,1828.43 689,1828.43 722.5,1828.43 756,1828.43 789.5,1828.43 823,1828.43 856.5,1828.43 890,1828.43 923.5,1828.43 957,1828.43 990.5,1828.43
  other v2: 1309,1061.76 1280,1064.76 1251,1066.76 1297,1096.76 1254,1098.76 1298,1131.76 1257,1132.76 1185,1826.76 1241,1826.76 1218,1827.76 1269,1827.76 1303,1828.76 1332,1828.76 1017,1829.76 1362,1829.76
I2C1_SCL: P5.2 R20.2 U3.92 U7.10
I2C1_SDA: P5.1 R21.2 U3.93 U7.9
IN1: CA1.5 CMP1.5 P8.3 RA2.5
IN2: CA1.6 CMP1.7 P8.2 RA2.6
IN3: CA1.7 CMP1.11 P8.1 RA2.7
INPUT1: CMP1.2 U3.1
INPUT2: CMP1.1 U3.2
INPUT3: CMP1.13 U3.3
KEY1: KEY1.1 R9.2 U3.81
KEY2: KEY2.1 R10.2 U3.82
LED_BLUE: R8.1 U3.85
LED_GREEN: R2.1 U3.84
LED_RED: R1.1 U3.83
MOTOR1_A: C36.1 P10.1 U3.77 V1.2
MOTOR1_B: C38.2 P10.2 U3.89 V3.2
MOTOR1_DIR: R28.2 R36.2 U3.42
MOTOR1_PWM: R24.2 U3.40
MOTOR2_A: C37.2 P11.1 U3.63 V2.2
MOTOR2_B: C39.2 P11.2 U3.64 V4.2
MOTOR2_DIR: R30.2 R38.2 U3.45
MOTOR2_PWM: R26.2 U3.44
MOTOR3_A: C40.2 P12.1 U3.59 V5.2
MOTOR3_B: C41.2 P12.2 U3.60 V6.2
MOTOR3_DIR: R42.2 R46.2 U3.66
MOTOR3_PWM: R40.2 U3.65
NetC6_1: C6.1 D4.2 L1.1 U1.8 | length 56.8
  Top Layer w10: 774,1469.76 776,1467.76 C6.1
NetC6_2: C6.2 U1.1 | length 118
  Top Layer w10: C6.2 941,1467.76 951,1477.76 951,1527.39 U1.1
NetC11_2: C11.2 U1.6 | length 224.9
  Top Layer w10: U1.6@717,1636.76 U1.6 801,1636.76 811,1646.76 811,1719.76 C11.2
NetC17_1: C17.1 U3.49
NetC18_1: C18.1 U3.73
NetC26_2: C26.2 R13.2 R14.2
NetC31_1: C31.1 CMP1.4 CMP1.6 CMP1.8 CMP1.10 R18.2 R19.1
NetD1_2: D1.2 F1.1
NetIC1_1: IC1.1 R13.1 U4.7
NetIC1_4: IC1.4 R14.1 U4.6
NetLED1_1: LED1.1 R1.2
NetLED2_1: LED2.1 R2.2
NetLED3_1: LED3.1 R8.2
NetLED4_1: LED4.1 R37.1
NetLED5_1: LED5.1 R39.1
NetLED6_1: LED6.1 R47.1
NetP7_1: P7.1 U6.18
NetR3_2: R3.2 R5.2 U1.3 | length 173.6
  Top Layer w10: U1.3@960.36,1637.76 U1.3 995,1636.76 995,1639.76 R3.2 ; R5.2@1044,1752.76 1047,1749.76 R3.2@1047,1689.76
NetR4_2: R4.2 R7.1 U1.5 | length 216.6
  Top Layer w10: R4.2 R7.1 ; R7.1@669,1600.76 698,1629.76 698,1675.76 709,1686.76 U1.5 U1.5@754.64,1685.76
NetR6_2: R6.2 U1.4 | length 120.6
  Top Layer w10: R6.2 907.5,1692.26 913,1686.76 U1.4
NetR15_1: R15.1 U4.8
NetR16_2: R16.2 U6.3
NetR17_1: R17.1 U6.16
NetR22_2: R22.2 U7.3
NetR23_2: R23.2 U7.4
NetR24_1: R24.1 U8.1
NetR25_2: R25.2 U8.3
NetR26_1: R26.1 U9.1
NetR27_2: R27.2 U9.3
NetR28_1: R28.1 U8.4
NetR29_2: R29.2 U8.6
NetR30_1: R30.1 U9.4
NetR31_2: R31.2 U9.6
NetR32_1: R32.1 U8.9
NetR33_2: R33.2 U8.8
NetR34_1: R34.1 U9.9
NetR35_2: R35.2 U9.8
NetR36_1: R36.1 U8.12
NetR37_2: R37.2 U8.11
NetR38_1: R38.1 U9.12
NetR39_2: R39.2 U9.11
NetR40_1: R40.1 U10.1
NetR41_2: R41.2 U10.3
NetR42_1: R42.1 U10.4
NetR43_2: R43.2 U10.6
NetR44_1: R44.1 U10.9
NetR45_2: R45.2 U10.8
NetR46_1: R46.1 U10.12
NetR47_2: R47.2 U10.11
NetU3_35: U3.35 U8.2 U10.2
NetU3_36: U3.36 U9.2
NetU3_37: U3.37
NRST: C16.2 R11.2 U3.14
OUT1: P13.1 R33.1
OUT2: P13.2 R35.1
OUT3: P13.3 R45.1
OUTPUT1: R32.2 U3.41
OUTPUT2: R34.2 U3.43
OUTPUT3: R44.2 U3.62
PB12: U3.51
PB13: U3.52
PB14: U3.53
PB15: U3.54
PC1: U3.16
PC2: U3.17
PC3: U3.18
PC4: U3.33
PD8: U3.55
PD9: U3.56
PD10: U3.57
PD11: U3.58
PH0-OSC_IN: C14.2 U3.12 Y1.1
PH1-OSC_OUT: C15.2 U3.13 Y1.2
PWM1: P10.4 R25.1
PWM2: P11.4 R27.1
PWM3: P12.4 R41.1
SPI1_CS: RA1.5 U3.29 U6.9
SPI1_MISO: RA1.6 U3.31 U6.10
SPI1_MOSI: RA1.7 U3.32 U6.13
SPI1_SCK: RA1.8 U3.30 U6.14
SWCLK: P2.3 U3.76
SWDIO: P2.1 U3.72
UART4_RX: P4.2 U3.24
UART4_TX: P4.1 U3.23
USART1_RX: P3.2 U3.69
USART1_TX: P3.1 U3.68
USART2_RX: U3.26 U6.22
USART2_TX: U3.25 U6.21
USART3_RX: R23.1 U3.48
USART3_TX: R22.1 U3.47
VCC_+3.3V: C1.2 U4.3
VCC_+3.3V: C5.1 C13.1 C19.2 C20.2 C21.2 C22.2 C23.2 C24.2 C25.2 C27.1 C28.1 C30.1 C32.1 C33.1 CMP1.3 P1.2 R9.1 R10.1 R11.1 R16.1 R19.2 R20.1 R21.1 RA1.1 RA1.2 RA1.3 RA1.4 U2.5 U3.6 U3.11 U3.21 U3.22 U3.28 U3.50 U3.75 U3.100 U5.5 U6.1 U6.8 U7.2 U7.11 U8.5 U8.10 U8.13 U9.5 U9.10 U9.13 U10.5 U10.10 U10.13
VCC_+5V: +5V.0 C12.2 C29.2 R48.2 U2.1 U2.3 U5.1 U5.3
VCC_OUT: C7.1 C8.1 L1.2 R4.1 R48.1 | length 312.1
  Top Layer w10: 656,1157.76 656,1455.76 R4.1
  other v1: 873,884.76 903.75,884.76 934.5,884.76 965.25,884.76 996,884.76 873,913.76 903.75,913.76 934.5,913.76 965.25,913.76 996,913.76 873,942.76 903.75,942.76 934.5,942.76 965.25,942.76 996,942.76 873,971.76 903.75,971.76 934.5,971.76 965.25,971.76 996,971.76
VDD-5: C34.1 C35.1 C43.1 U8.14 U9.14 U10.14
VIN+: D1.1 P14.1 P14.3
pads on no net: C5. C7. C8. C27. C28. CA1.8 CMP1.14 P15.0 P16.0 P17.0 P18.0 RA2.8 U2.4 U3.4 U3.5 U3.7 U3.8 U3.9 U3.15 U3.34 U3.38 U3.39 U3.46 U3.61 U3.67 U3.78 U3.79 U3.80 U3.86 U3.87 U3.88 U3.90 U3.91 U3.95 U3.96 U3.97 U3.98 U4.5 U5.4 U6.2 U6.4 U6.5 U6.6 U6.7 U6.11 U6.12 U6.17 U6.19 U6.20 U7.1 U7.6 U7.7 U7.12
copper on no net: | length 35.4
  Bottom Layer w10: 561,1851.76 575,1865.76 ; 852,1865.76 863,1876.76

## Keep-outs
Keep-Out Layer:
  the board outline again, w10

## Other copper
Top Layer:
  region net +24V: 1079,1415.76 1079,1624.76 1018,1624.76 1018,1415.76
  region net GND: 841,1565.76 841,1606.76 706,1606.76 706,1565.76
  region net VCC_OUT: 1154,868.76 1154,991.76 856,991.76 856,868.76
  region net VCC_OUT: 1152,878.76 1152,1168.76 1026,1168.76 1026,878.76
  region net VCC_OUT: 1153,1021.76 1153,1169.76 651,1169.76 651,1021.76
  region net GND: 1350,866.76 1350,1784.76 1200,1784.76 1200,866.76
  region net NetC6_1: 1001,1233.76 1001,1407.76 672,1407.76 672,1233.76
  region net NetC6_1: 802,1370.76 802,1553.76 706,1553.76 706,1370.76
  region net +24V: 1163,1415.76 1163,1502.76 1029,1502.76 1029,1415.76
  region net +24V: 1171,1415.76 1171,1782.76 1090,1782.76 1090,1415.76
  region net GND: 1350,1700.76 1350,1783.76 1268,1783.76 1268,1700.76
  region net GND: 613,783.76 613,1859.76 565,1859.76 565,783.76
  region net GND: 1426,1806.76 1426,1868.76 558,1868.76 558,1806.76
  region net GND: 1440,785.76 1440,1868.76 1379,1868.76 1379,785.76
  region net GND: 1430,783.76 1430,834.76 565,834.76 565,783.76
Bottom Layer:
  region net GND: 903,1525.76 903,1697.76 816,1697.76 816,1525.76

## Silkscreen, mask and mechanical layers (free items; w line width, h text height)
Top Overlay:
  text "IN1" at 425,2405 h50
  text "IN2" at 555,2405 h50
  text "IN3" at 725,2405 h50
  text "OUT1" at 875,2405 h50
  text "OUT2" at 1055,2405 h50
  text "OUT3" at 1245,2405 h50
Top Solder:
  region: 631,1857.76 553,1857.76 553,772.76 631,772.76
  region: 553,1878.76 553,1799.76 1432,1799.76 1432,1878.76
  region: 553,848.76 553,770.76 1443,770.76 1443,848.76
  rectangle: 1365,781.76 1442,1879.76
Bottom Solder:
  region: 910,1514.76 910,1705.76 808,1705.76 808,1514.76

## Text inside footprints (layer, text, board x,y; h text height)
U7: Top Overlay "D3" at 3575.63,1165.63 h35; Top Overlay "D2" at 3565.63,1665.63 h35; Top Overlay "D1" at 3185.63,1165.63 h35; Top Overlay "D0" at 3175.63,1665.63 h35; Top Overlay "SCL" at 3565.63,1465.63 h35; Top Overlay "SDA" at 3565.63,1365.63 h35; Top Overlay "TX" at 3185.63,1365.63 h35; Top Overlay "RX" at 3185.63,1465.63 h35; Top Overlay "GND" at 3565.63,1265.63 h35; Top Overlay "GND" at 3175.63,1265.63 h35; Top Overlay "VCC" at 3565.63,1565.63 h35; Top Overlay "VCC" at 3175.63,1565.63 h35